# Altium PCB MQ6.PcbDoc
Units mm, origin at the board's own origin, x right, y up, seen from the top; angles counter-clockwise.
Board outline 37.5 x 37.5 mm, 2 copper layers (Top Layer, Bottom Layer); 18 components, 11 nets, 53 pads, 10 vias.
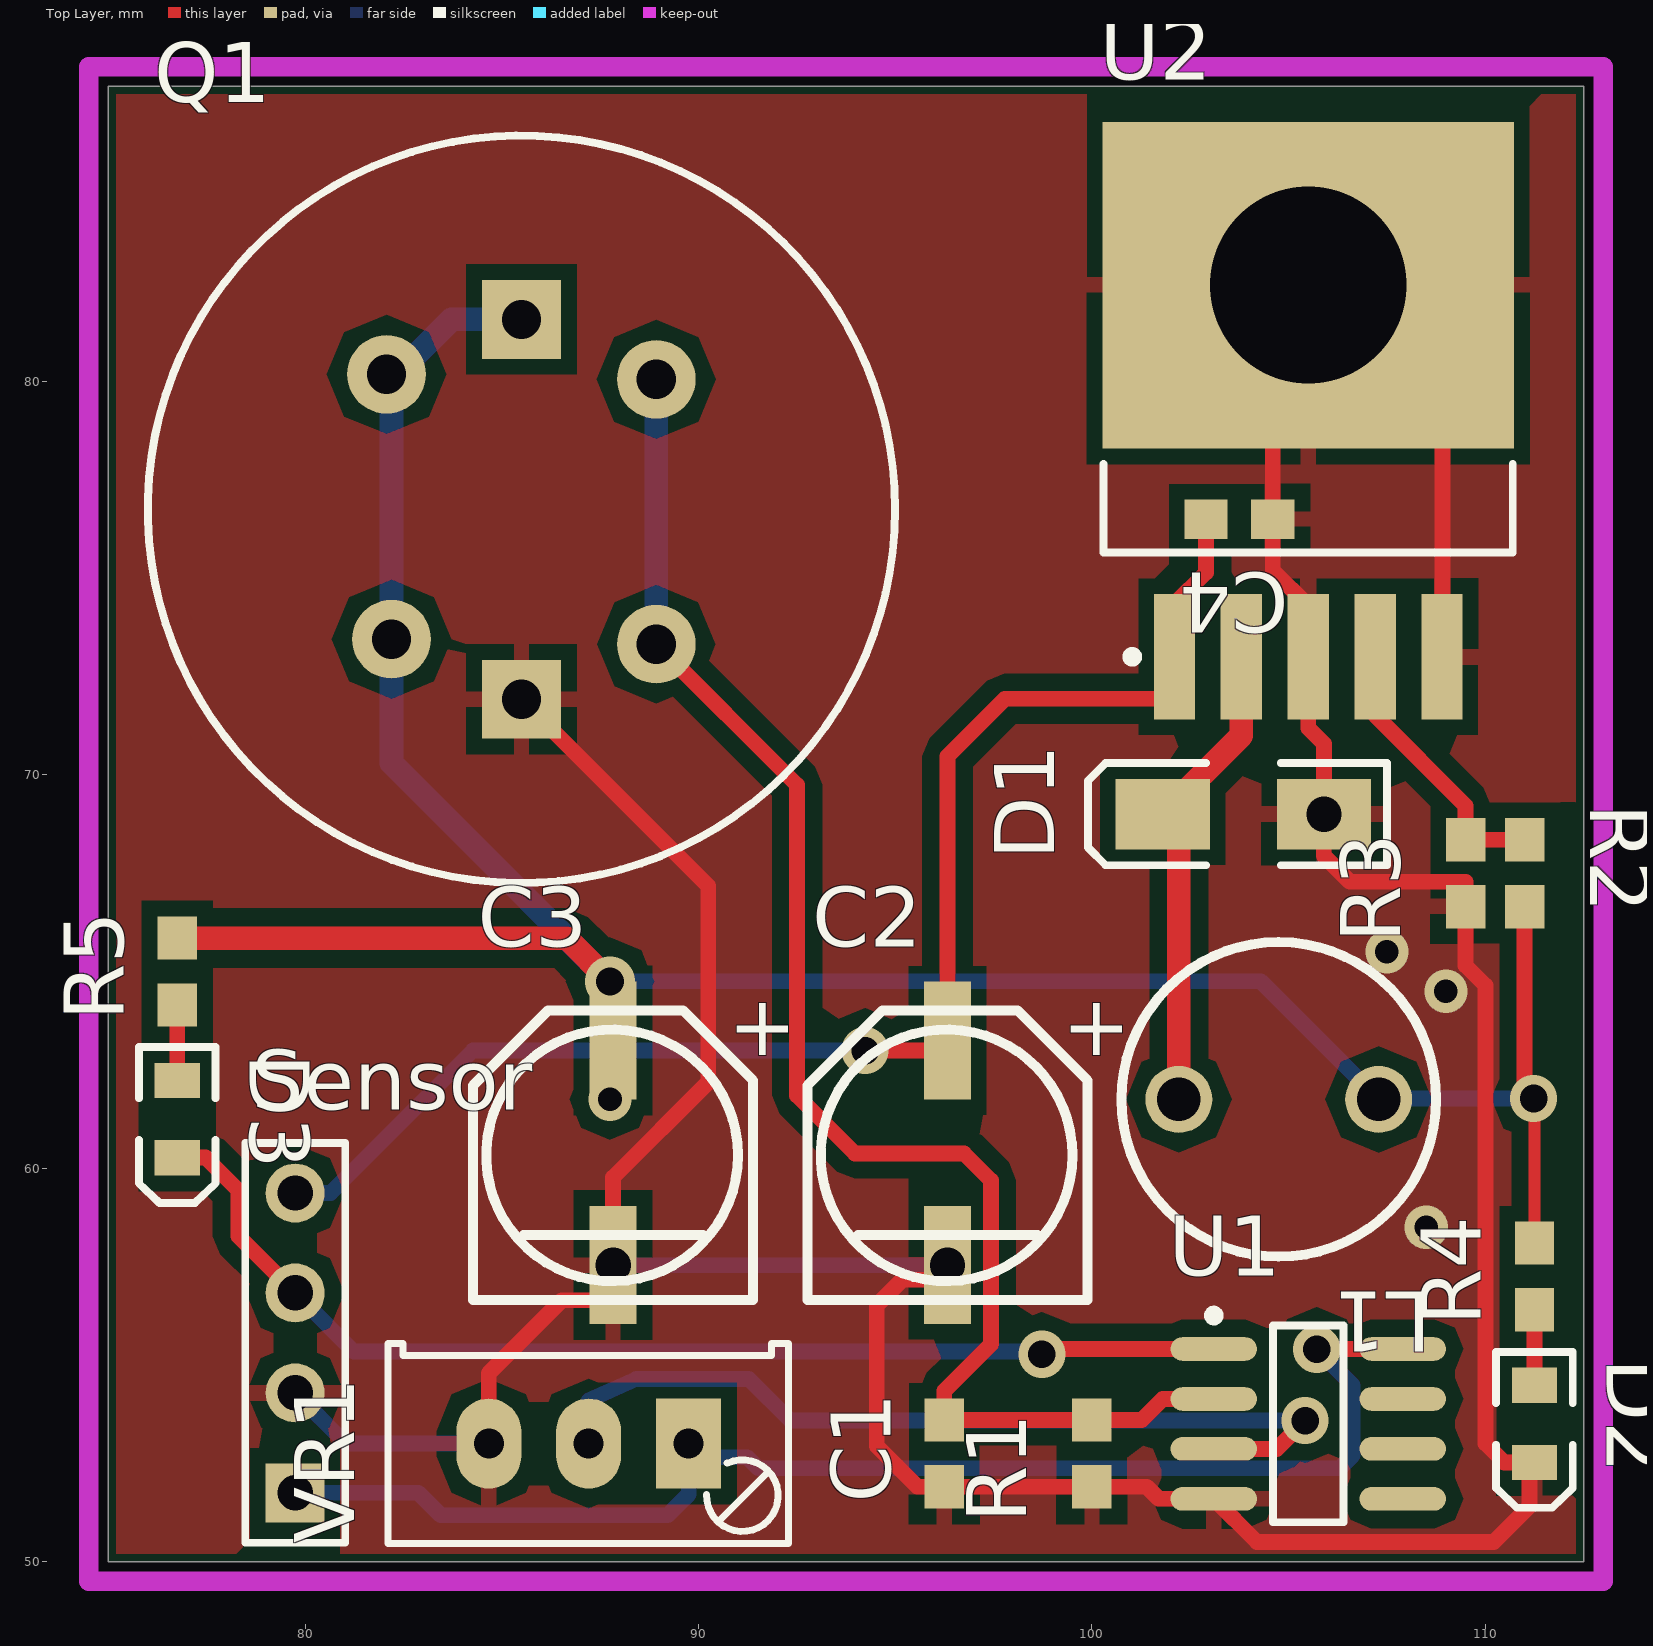
[diagram p0: Top Layer view]
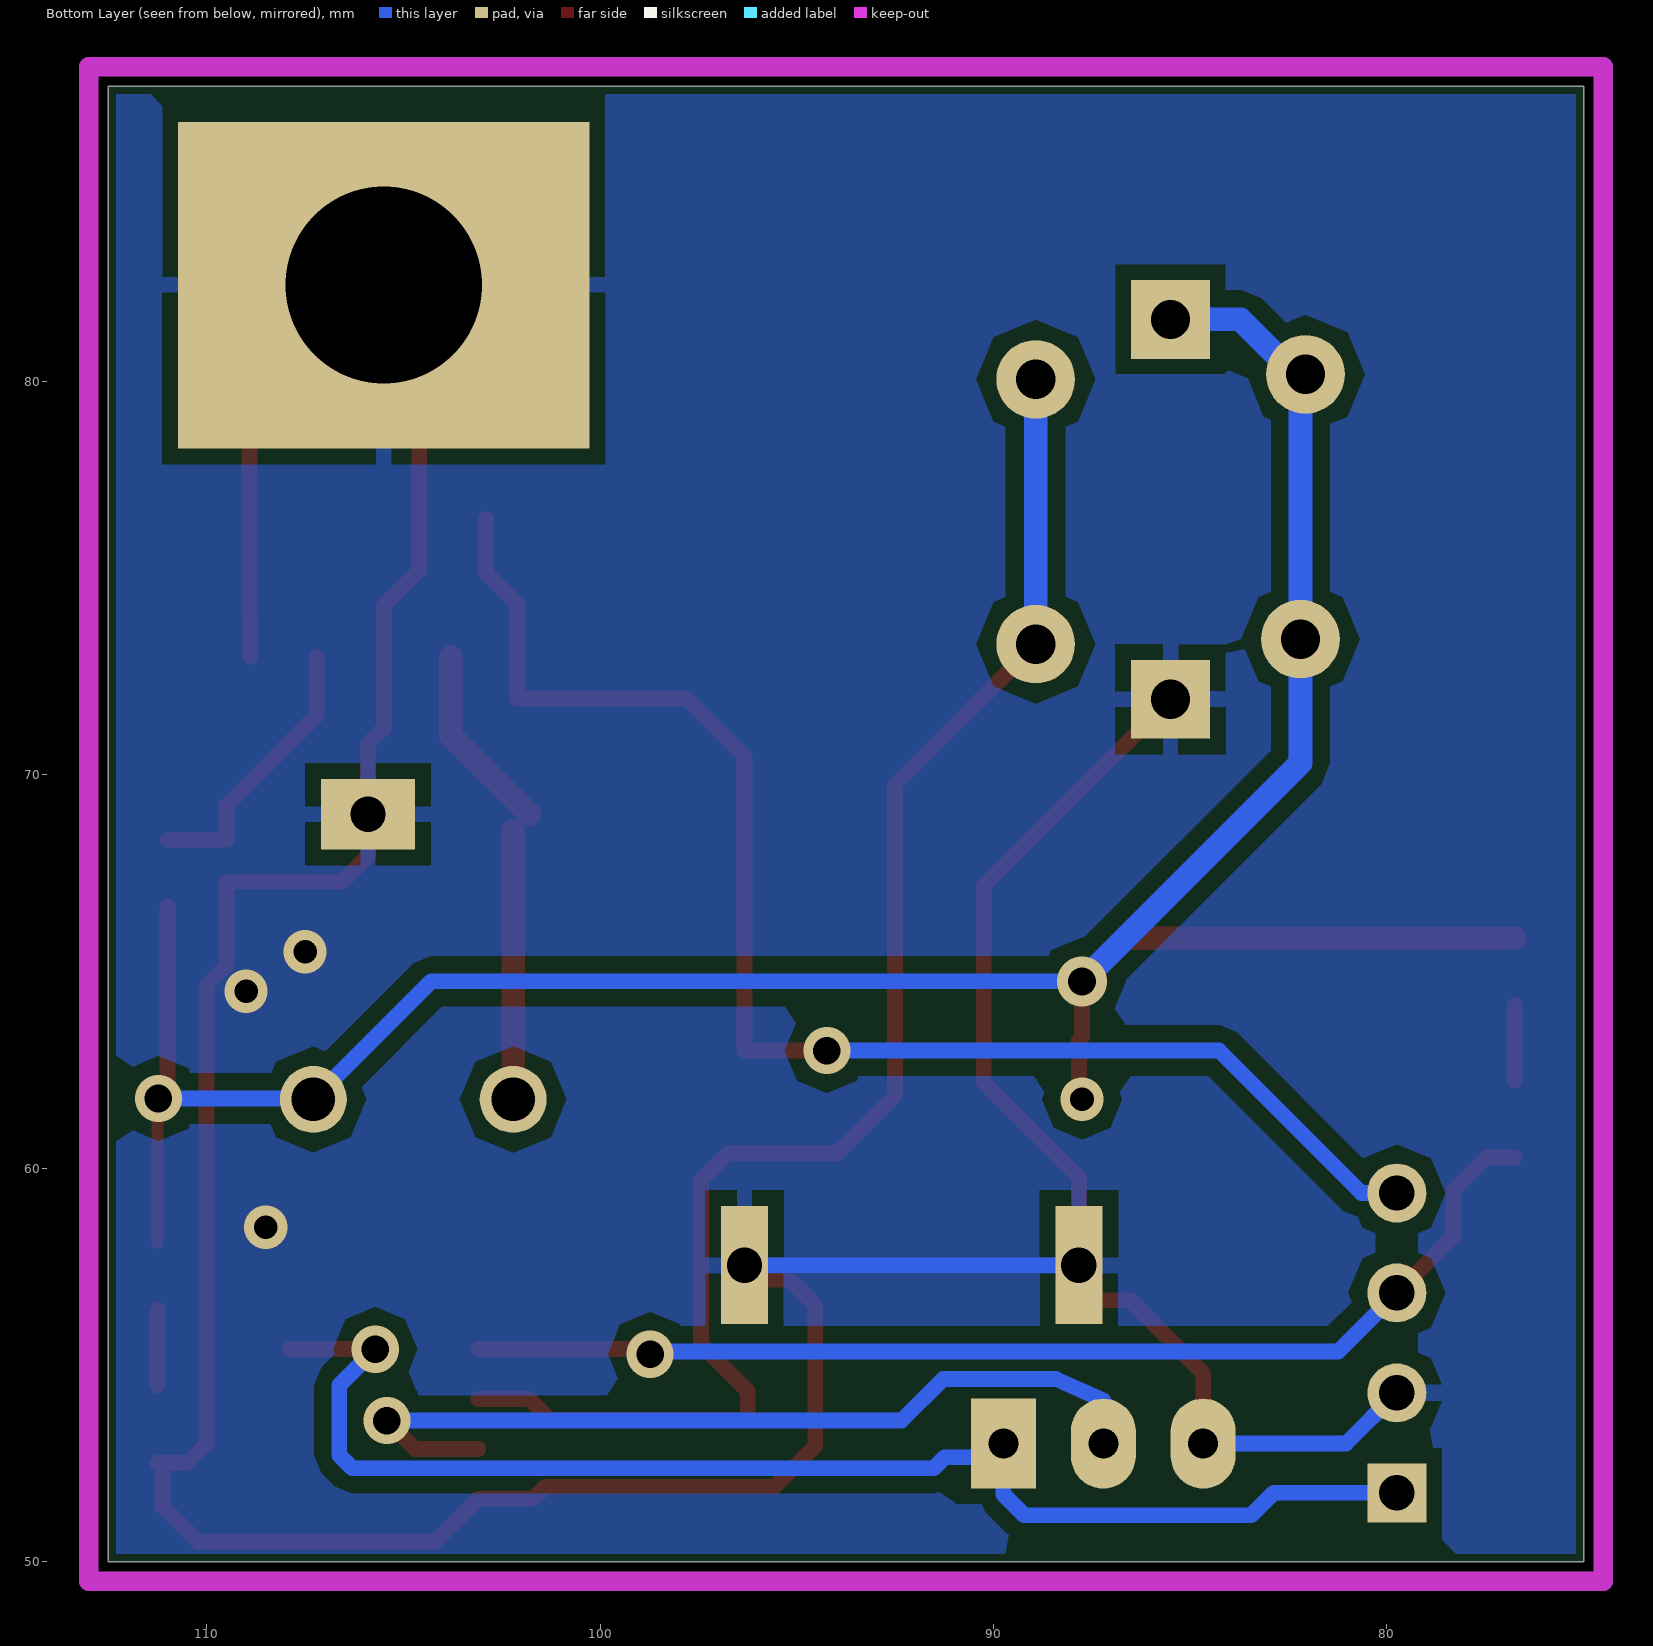
[diagram p1: Bottom Layer view, seen from below]

## Layer stack, top to bottom
Top Layer: signal copper 0.0356
Dielectric: dielectric 0.32, FR-4, Dk 4.8
Bottom Layer: signal copper 0.0356

## Board outline
75,50 112.5,50 112.5,87.5 75,87.5

## Design rules (kind name [scope] priority, off if disabled: settings)
Clearance [All] p1: gap=0.4
PlaneClearance [All] p1: clearance=0.5
PlaneConnect [All] p1: planeconnectstyle=Relief reliefexpansion=0.5 reliefentries=4 reliefconductorwidth=0.4 reliefairgap=0.3
PolygonConnect [All] p1: connectstyle=Relief reliefconductorwidth=0.4 reliefentries=4 polygonreliefangle="90 Angle"
RoutingVias [All] p1: holewidth=0.7 width=1.2 viastyle="Through Hole" minholewidth=0.6 minwidth=1.1 maxholewidth=5 maxwidth=5
SilkscreenOverComponentPads [All] p1: minsilkscreentomaskgap=0.254
SolderMaskExpansion [All] p1: expansion=0.102
Width [All] p1: maxlimit=5 minlimit=0.3 preferedwidth=0.4
25 further rules are at their usual default settings.

## Components (designator, comment, footprint, x,y, rotation, side; value= is the part's Value field where it differs from the comment)
C1 "CAP NP" "SMD 0603" 96.25,52.75 r90 top
C2 "Cap" "SMD CAP 7x7" 91.25,55.25 r0 top
C3 "Cap" "SMD CAP 7x7" 82.75,55.25 r0 top
C4 "CAP NP" "SMD 0603" 103.75,76.5 r180 top
D1 "SS14" SS14 103.75,69 r180 top
D2 "Led" "Led 0805" 111.25,53.5 r270 top
D3 "Led" "Led 0805" 76.75,61.25 r270 top
L1 "Inductor" "Inductor C8x10" 104.75,61.75 r180 top
Q1 "MQ6" MQ6 85.5,76.75 r0 top
R1 "Res" "SMD 0603" 100,52.75 r90 top
R2 "Res" "SMD 0603" 111,67.5 r270 top
R3 "Res" "SMD 0603" 109.5,67.5 r90 top
R4 "Res" "SMD 0603" 111.25,57.25 r90 top
R5 "Res" "SMD 0603" 76.75,65 r90 top
Sensor "Header 4" HDR1X4 79.75,51.75 r90 top
U1 "LM358AM" M08A_N 105.5,53.5 r0 top
U2 "LM2596S-ADJ" TS5B_N 105.5,79 r90 top
VR1 "10K" VR1 89.75,53 r180 top

## Footprints (in the part's own frame and the unit in brackets; to place one, negate y for a bottom-side part, rotate by r counter-clockwise, add the part's x,y. Pads: shape width x height; smd on the part's side, far side on the other; paste and mask are expansions set on the pad)
HDR1X4 [mm] "Connector; Header; 4 Position"
  rect 1.5x1.5 hole 0.9: 1(0,0)
  round 1.5 hole 0.9: 2(2.54,0) 3(5.08,0) 4(7.62,0)
  silkscreen extent -1.27,-1.27 8.89,1.27
"Inductor C8x10" [mm]
  round 1.7 hole 1.1: 1(2.54,0) 2(-2.54,0)
  silkscreen extent -4,-4 4,4
"Led 0805" [mm]
  rect 0.9x1.15 smd: 1(-0.98,0) 2(0.98,0)
  silkscreen extent -1.83,-0.97 2.13,0.98
M08A_N [mm] "SOIC, 8-Leads, Body 4.9x3.9mm, Pitch 1.27mm, IPC Medium Density"
  oval 2.2x0.6 smd: 1(-2.4,1.905) 2(-2.4,0.635) 3(-2.4,-0.635) 4(-2.4,-1.905) 5(2.4,-1.905) 6(2.4,-0.635) 7(2.4,0.635) 8(2.4,1.905)
  silkscreen extent -2.52,-2.5 0.9,2.88, body extent -2,-2.5 2,2.5, height 1.75
MQ6 [mm]
  rect 2x2 hole 1: 1(0,4.826) 4(0,-4.826)
  round 2 hole 1: 2(3.429,3.302) 3(3.429,-3.429) 5(-3.302,-3.302) 6(-3.429,3.429)
  silkscreen extent -9.5,-9.5 9.5,9.5
"SMD 0603" [mm]
  rect 1.1x1 smd: 1(-0.85,0) 2(0.85,0)
"SMD CAP 7x7" [mm] "35V 100uF"
  rect 1.2x3 smd: 1(5.08,8.001)
  rect 1.2x3 hole 0.9: 2(5.08,2.286)
  silkscreen extent 1.52,1.4 8.64,8.76
SS14 [mm] "Diode"
  rect 2.4x1.8 hole 0.9: 1(-2.15,0)
  rect 2.4x1.8 smd: 2(1.95,0)
  silkscreen extent -3.75,-1.3 3.85,1.3
TS5B_N [mm] "D2-PAK, 6-Leads, Body 8.6x10.2mm, Pitch 1.7mm, Lead Span 14.1mm, IPC Medium Density"
  rect 3.2x1.05 smd: 1(-6,3.4) 2(-6,1.7) 3(-6,0) 4(-6,-1.7) 5(-6,-3.4)
  rect 8.3x10.45 hole 5: 6(3.45,0)
  silkscreen extent -6.12,-5.2 -1.1,5.2, body extent -3.35,-5.2 6.05,5.2, height 4.65
VR1 [mil] "Variable Resistor"
  rect 65x90 hole 30: 1(0,0)
  oval 65x90 hole 30: 2(100,0) 3(200,0)
  silkscreen extent -100,-100 301,100, body extent -88,-130 288,110, height 455

## Part data
D1: library part "Diode Schottky"
Sensor: "Header, 4-Pin"
U1: "Low Power Dual Operational Amplifier"
U2: "SIMPLE SWITCHER Power Converter 150 KHz 3A Step-Down Voltage Regulator"
VR1: library part VR, "Var Resistor"

## Via types
v1: diameter 1.2, hole 0.7, Top Layer to Bottom Layer, 5 vias
v2: diameter 1.1, hole 0.6, Top Layer to Bottom Layer, 4 vias
v3: diameter 1.27, hole 0.711, Top Layer to Bottom Layer, 1 vias

## Nets (pads, with @x,y where several pads share a name; then routed paths per layer and width w, separated by ;. In a path a pad name is that pad's centre, name@x,y a point inside that pad or via, vN(x,y) a via of type N, cw(c..) or ccw(c..) an arc to the next point about the centre after c; other vN are vias at no path point)
+5: C3.1 L1.2 Q1.1 Q1.5 Q1.6 R2.2 R4.2 R5.2 | length 69.4
  Top Layer w0.3: R4.2 v1@111.25,61.749
  Top Layer w0.4: v2(87.75,61.75) 87.83,61.83 87.83,63.246 87.75,63.326 v3(87.75,64.75) ; R2.2 111,61.999 v1(111.227,61.773)
  Top Layer w0.6: R5.2 86.65,65.85 v3(87.75,64.75)
  Bottom Layer w0.4: v3(87.75,64.75) 104.29,64.75 L1.2 107.313,61.773 v1(111.227,61.773)
  Bottom Layer w0.6: Q1.1 83.722,81.576 82.198,80.052 Q1.5 82.198,70.302 v3(87.75,64.75)
FB: R2.1 R3.2 U2.4 | length 7.1
  Top Layer w0.4: U2.4 107.2,71.515 109.5,69.215 R3.2 R2.1
GND: C1.1 C2.2 C3.2 C4.1 D1.1 D2.2 Q1.4 R1.1 R3.1 Sensor.2 U1.4 U2.3 U2.5 U2.6 VR1.3 | length 111.1
  Top Layer w0.4: VR1.3 84.67,54.788 86.524,56.642 87.83,56.642 C3.2 87.83,59.766 90.25,62.186 90.25,67.174 Q1.4 ; C2.2 96.33,57.168 95.183,57.168 94.53,56.515 94.53,52.938 95.567,51.9 C1.1 R1.1 101.397,51.9 101.702,51.595 U1.4 104.195,50.5 110.215,50.5 111.125,51.41 D2.2@111.125,52.52 ; U2.5 108.9,74.066 108.915,74.066 108.915,82.45 U2.6 105.5,79.919 104.6,79.019 C4.1 104.6,75.195 105.5,74.295 U2.3 105.5,71.19 105.9,70.79 D1.1 105.893,69 105.893,67.945 106.553,67.285 109.5,67.285 R3.1 109.5,65.15 110.007,64.643 110.007,53.003 110.49,52.52 D2.2@111.125,52.52 ; D2.2 D2.2@111.125,52.52
  Bottom Layer w0.4: Sensor.2 81.04,53 VR1.3 ; C3.2 C2.2
  other v2: 108.5,58.5 109,64.5 107.5,65.5
NetC1_2: C1.2 Q1.2 Q1.3 R1.2 U1.2 | length 39.2
  Top Layer w0.4: Q1.3 92.507,69.743 92.507,61.849 93.98,60.376 96.749,60.376 97.434,59.69 97.434,55.524 96.25,54.34 C1.2 R1.2 101.27,53.6 101.805,54.135 U1.2
  Bottom Layer w0.6: Q1.3 Q1.2
NetD1_2: D1.2 L1.1 U2.2 | length 11.7
  Top Layer w0.6: D1.2 103.8,71 U2.2 ; L1.1 D1.2@102.21,68.59
NetD2_1: D2.1 R4.1 | length 1.9
  Top Layer w0.4: D2.1 R4.1
NetD3_1: D3.1 R5.1 | length 1.9
  Top Layer w0.4: D3.1 R5.1
OUT: D3.2 Sensor.3 U1.1 | length 29.2
  Top Layer w0.4: D3.2 77.47,60.27 78.308,59.432 78.308,58.272 Sensor.3 ; v1(98.73,55.27) 98.864,55.405 U1.1
  Bottom Layer w0.4: Sensor.3 81.237,55.343 98.657,55.343 v1(98.73,55.27)
VCC: Sensor.1 U1.8 VR1.1 | length 34.1
  Top Layer w0.4: v1(105.715,55.397) 105.722,55.405 U1.8
  Bottom Layer w0.4: Sensor.1 82.88,51.75 83.449,51.181 89.218,51.181 89.75,51.713 VR1.1@89.75,52.654 ; VR1.1 VR1.1@89.75,52.654 ; v1(105.715,55.397) 106.629,54.483 106.629,52.705 106.299,52.375 91.516,52.375 91.237,52.654 VR1.1@89.75,52.654
VIN: C2.1 C4.2 Sensor.4 U2.1 | length 36.8
  Top Layer w0.4: v1(94.234,62.992) 96.33,62.992 C2.1 96.33,70.473 97.79,71.933 102.1,71.933 U2.1 102.1,74.346 102.9,75.146 C4.2
  Bottom Layer w0.4: Sensor.4 80.645,59.37 84.267,62.992 v1(94.234,62.992)
VSS: U1.3 VR1.2 | length 22.5
  Top Layer w0.4: U1.3 104.699,52.865 v1(105.419,53.585)
  Bottom Layer w0.4: VR1.2 87.21,54.102 88.417,54.643 91.28,54.643 92.338,53.585 v1(105.419,53.585)
pads on no net: U1.5 U1.6 U1.7

## Polygon pours and split planes (outlines as drawn)
GND on Top Layer "Top Paste-No Net" (solid, pour order 2): 75,87.5 112.5,87.5 112.5,50 75,50
GND on Bottom Layer "Top Paste-No Net" (solid, pour order 4): 75,87.5 112.5,87.5 112.5,50 75,50

## Keep-outs
Keep-Out Layer:
  lines w0.5: 74.5,49.5 74.5,88 75,88 113,88 113,49.5 74.5,49.5

## Silkscreen, mask and mechanical layers (free items; w line width, h text height)
Bottom Solder:
  text "WSAN MQ6" at 101.5,68 h3
  text "+3.3V G S Vin" at 76.5,50.5 h2 r270

## Text inside footprints (layer, text, board x,y; h text height)
C2: Top Overlay "+" at 99.251,62.87 h1.52
C3: Top Overlay "+" at 90.751,62.87 h1.52